# Altium PCB Boost Converter.PcbDoc
Units mm, origin at the board's own origin, x right, y up, seen from the top; angles counter-clockwise.
Board outline 20.27 x 16.42 mm, 2 copper layers (Top Layer, Bottom Layer); 9 components, 5 nets, 22 pads, 12 vias.
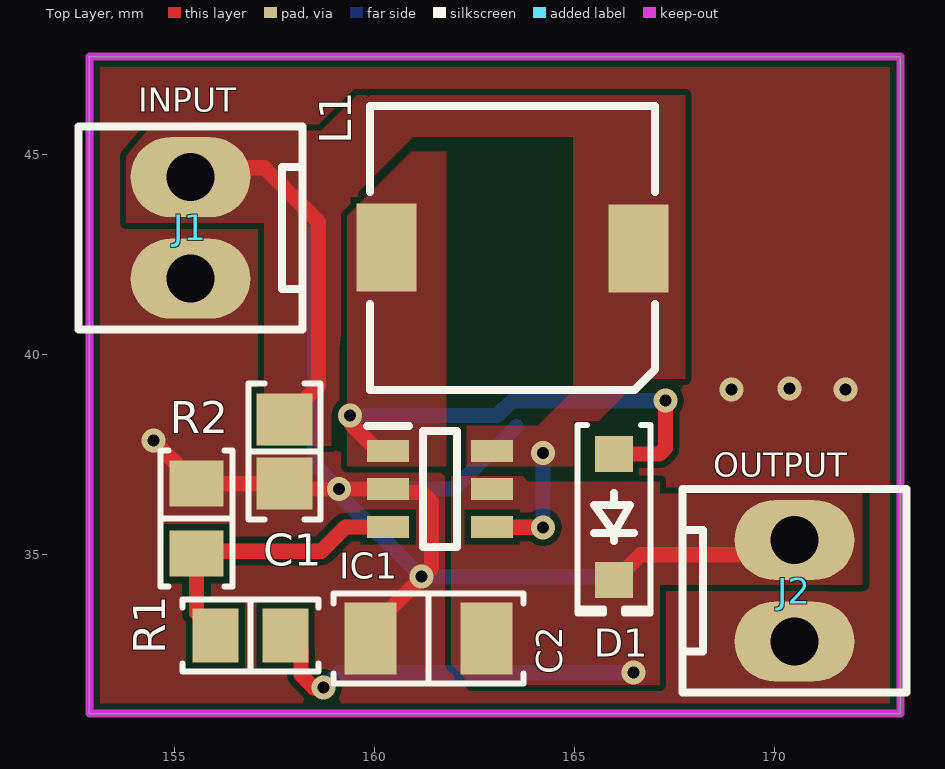
[diagram p0: Top Layer view]
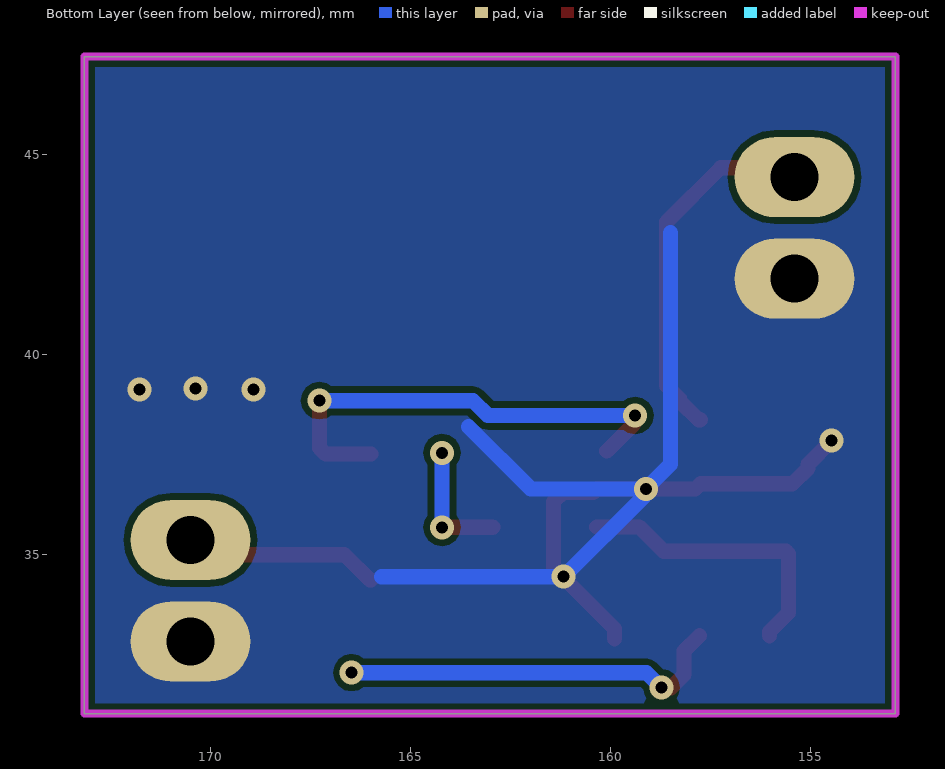
[diagram p1: Bottom Layer view, seen from below]
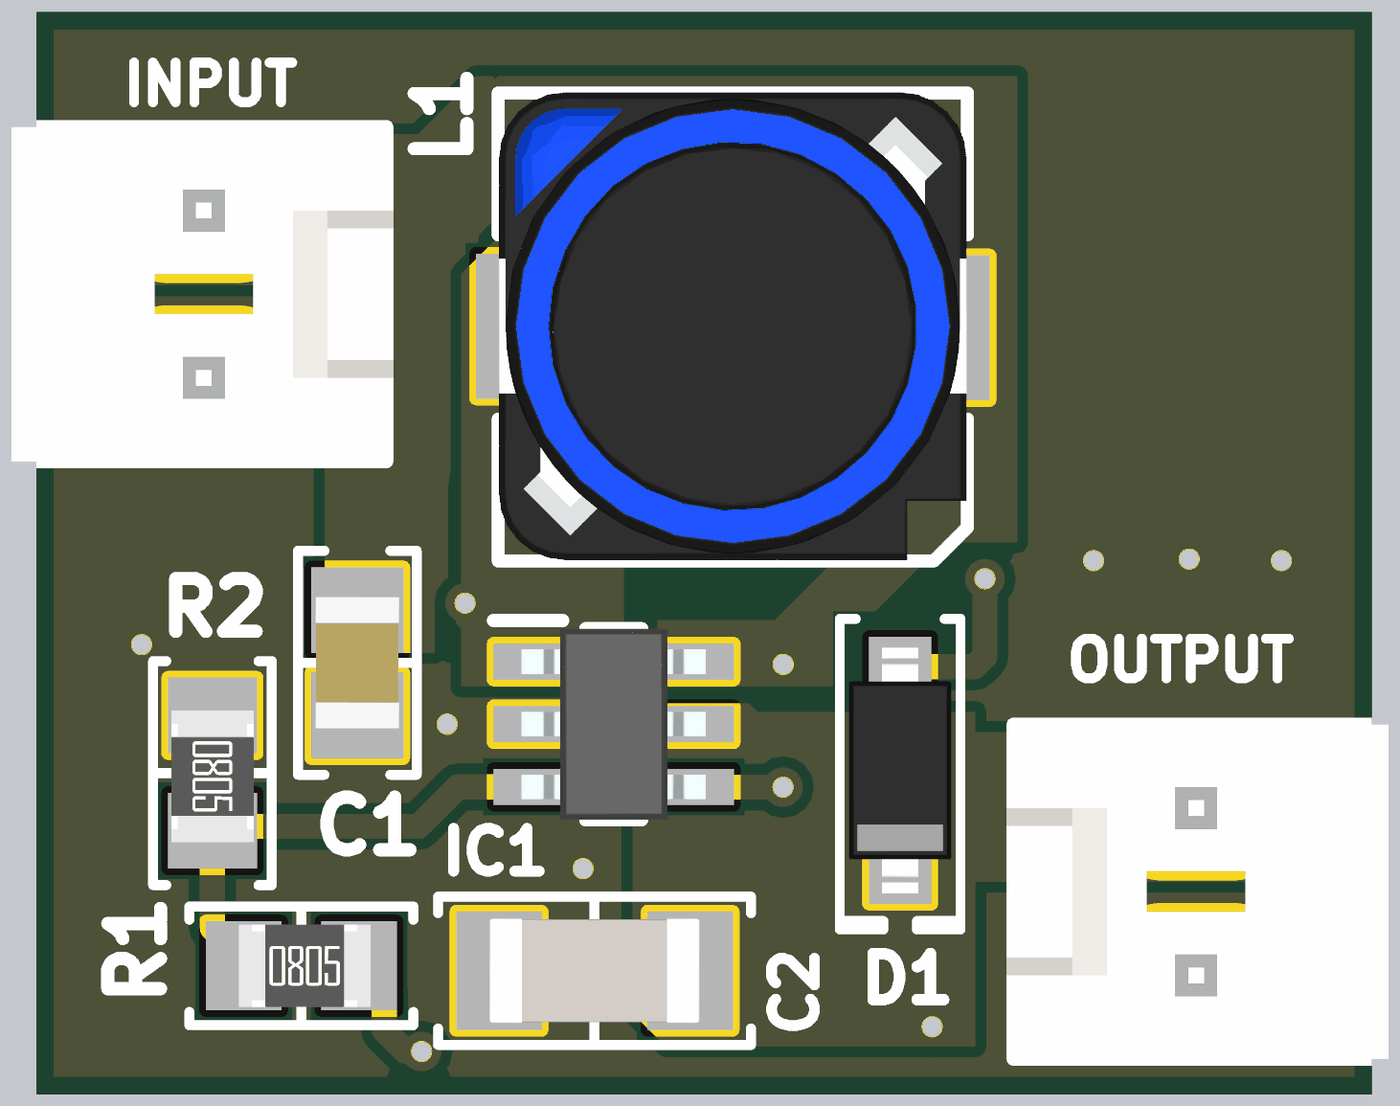
[diagram p2: 3D render of the assembled board from above, using the file's embedded part models]

## Layer stack, top to bottom
Top Solder: solder mask 0.0102, Solder Resist, Dk 3.5
Top Layer: signal copper 0.0356
Dielectric 1: dielectric 0.32, FR-4, Dk 4.8
Bottom Layer: signal copper 0.0356
Bottom Solder: solder mask 0.0102, Solder Resist, Dk 3.5

## Board outline
152.875,31.025 152.875,47.45 173.15,47.45 173.15,31.025

## Design rules (kind name [scope] priority, off if disabled: settings)
Clearance [All] p1: gap=0.16 ignorepadtopadclearanceinfootprint=FALSE
HoleToHoleClearance [All] p1: gap=0.16 allowstackedmicrovias=TRUE
MinimumSolderMaskSliver [All] p1: minsoldermaskwidth=0.16
PolygonConnect [All] p1: connectstyle=Direct reliefconductorwidth=0.254 reliefentries=4 polygonreliefangle="90 Angle" airgapwidth=0.254
RoutingVias [All] p1: holewidth=0.3 width=0.6 viastyle="Through Hole" minholewidth=0.3 minwidth=0.6 maxholewidth=0.3 maxwidth=0.6
SilkToSilkClearance [All] p1: silktosilkclearance=0.16
SolderMaskExpansion "Via Tenting" [IsVia] p1: expansion=0.102 istentingtop=TRUE
SolderMaskExpansion [All] p2: expansion=0.102 istentingtop=FALSE
Width [All] p1: maxlimit=0.8 minlimit=0.16 preferedwidth=0.2
27 further rules are at their usual default settings.

## Components (designator, comment, footprint, x,y, rotation, side; value= is the part's Value field where it differs from the comment)
C1 "10µF" "CAP 0805_2012" 157.75,37.575 r90 top
C2 "22µF" "CAP 1206_3216 - 1.8MM" 161.35,32.9 r0 top
D1 "=PartNumber" SOD-123 165.989,35.941 r270 top
IC1 "LTC3429" SOT95P280X100-6N 161.641,36.642 r0 top
J1 "=PartNumber" "MOLEX KK 0022272021" 155.4,43.17 r90 top
J2 "=PartNumber" "MOLEX KK 0022272021" 170.5,34.1 r270 top
L1 "22µH" "TDK SLF7032" 163.449,42.672 r180 top
R1 "768 Ohms" "RES 0805_2012" 156.9,32.975 r0 top
R2 "255 kOhms" "RES 0805_2012" 155.55,35.9 r270 top

## Footprints (in the part's own frame and the unit in brackets; to place one, negate y for a bottom-side part, rotate by r counter-clockwise, add the part's x,y. Pads: shape width x height; smd on the part's side, far side on the other; paste and mask are expansions set on the pad)
"CAP 0805_2012" [mm] "Chip Capacitor, 2-Leads, Body 2.00x1.20mm, IPC Medium Density"
  rect 1.3x1.4 smd: 1(-0.8,0) 2(0.8,0)
  silkscreen extent -1.7,-0.9 1.7,0.9, body extent -1,-0.64 1,0.64, height 1.26
"CAP 1206_3216 - 1.8MM" [mm] "Chip Capacitor, 2-Leads, Body 3.25x1.60mm, IPC Medium Density"
  rect 1.3x1.8 smd: 1(-1.45,0) 2(1.45,0)
  silkscreen extent -2.37,-1.12 2.37,1.12, body extent -1.6,-0.8 1.6,0.8, height 1.8
"MOLEX KK 0022272021" [mm]
  oval 2x3 hole 1.2: 1(-1.27,0) 2(1.27,0)
  silkscreen extent -2.54,-2.79 2.54,2.79, body extent -2.54,-2.9 2.54,2.9, height 11.7
"RES 0805_2012" [mm] "Chip Resistor, 2-Leads, Body 2.00x1.25mm, IPC Medium Density"
  rect 1.15x1.35 smd: 1(-0.875,0) 2(0.875,0)
  silkscreen extent -1.7,-0.9 1.7,0.9, body extent -0.95,-0.62 1.05,0.63, height 0.6
SOD-123 [mm] "SOD, 2-Leads, Body 1.55x3.70mm, IPC Medium Density"
  rect 0.9x0.95 smd: 1(-1.575,0) 2(1.575,0)
  silkscreen extent -2.3,-0.92 2.41,0.92, body extent -1.86,-0.78 1.86,0.77, height 1.35
SOT95P280X100-6N [mm]
  rect 1.05x0.55 smd: 1(-1.3,0.95) 2(-1.3,0) 3(-1.3,-0.95) 4(1.3,-0.95) 5(1.3,0) 6(1.3,0.95)
  silkscreen extent -1.83,-1.45 0.43,1.58, body extent -1.4,-1.45 1.4,1.45, height 1
"TDK SLF7032" [mm] "Power Inductor, 2-Leads, TDK, SLF7032T-221MR29-2PF"
  rect 1.5x2.2 smd: 1(-3.15,0.013) 2(3.15,-0.012)
  silkscreen extent -3.56,-3.55 3.56,3.55, body extent -3.56,-3.56 3.56,3.54, height 3.39

## Part data
C1: library part C2012X6S1C106K125AC, "CAP CER 10UF 16V X6S 0805", Device Package="0805 (2012 Metric)", Manufacturer="TDK Corporation", Operating Temperature="-55°C ~ 105°C", Supplier Part Number 1=445-7611-1-ND, Temperature Coefficient=X6S, Tolerance=±10%, Voltage - Rated=16V, Applications="General Purpose", Capacitance=10µF, ComponentLink1Description=Datasheet, ComponentLink1URL=https://product.tdk.com/info/en/catalog/datasheets/mlcc_commercial_general_en.pdf?ref_disty=digikey, ComponentLink2Description="DigiKey Link", ComponentLink2URL=http://digikey.com/product-detail/en/tdk-corporation/C2012X6S1C106K125AC/445-7611-1-ND/2733683, Features="Low ESL", LastUpdated="1/21/2020 12:03:05 AM", Lifecycle Status=Active, Minimum Order=1, Mounting Type="Surface Mount, MLCC", Package / Case="0805 (2012 Metric)", Packaging=TapeAndReel, Part Number=C2012X6S1C106K125AC, Part Status=Active, PartId=2995, Price=0.09, Series=C, Size / Dimension="0.079\" L x 0.049\" W (2.00mm x 1.25mm)", Supplier 1=DigiKey, Thickness (Max)="0.057\" (1.45mm)"
C2: library part CL31X226KOHN3NE, "CAP CER 22UF 16V X6S 1206", Device Package="1206 (3216 Metric)", Manufacturer="Samsung Electro-Mechanics", Operating Temperature="-55°C ~ 105°C", Supplier Part Number 1=1276-3300-1-ND, Temperature Coefficient=X6S, Tolerance=±10%, Voltage - Rated=16V, Applications="General Purpose", Capacitance=22µF, ComponentLink1Description=Datasheet, ComponentLink1URL=http://www.samsungsem.com/kr/support/product-search/mlcc/CL31X226KOHN3NE.jsp, ComponentLink2Description="DigiKey Link", ComponentLink2URL=http://digikey.com/product-detail/en/samsung-electro-mechanics/CL31X226KOHN3NE/1276-3300-1-ND/3891386, LastUpdated="1/21/2020 12:03:49 AM", Lifecycle Status=Active, Minimum Order=1, Mounting Type="Surface Mount, MLCC", Package / Case="1206 (3216 Metric)", Packaging=TapeAndReel, Part Number=CL31X226KOHN3NE, Part Status=Active, PartId=19636, Price=0.13, Series=CL, Size / Dimension="0.126\" L x 0.063\" W (3.20mm x 1.60mm)", Supplier 1=DigiKey, Thickness (Max)="0.071\" (1.80mm)"
D1: library part MBR0520L, "DIODE SCHOTTKY 20V 500MA SOD123", Current - Average Rectified (Io)=500mA, Current - Reverse Leakage @ Vr="250µA @ 20V", Device Package=SOD-123, Manufacturer="ON Semiconductor", Operating Temperature - Junction="-65°C ~ 125°C", Supplier Part Number 1=MBR0520LCT-ND, Voltage - DC Reverse (Vr) (Max)=20V, Voltage - Forward (Vf) (Max) @ If="385mV @ 500mA", ComponentLink1Description=Datasheet, ComponentLink1URL=https://www.onsemi.cn/PowerSolutions/document/MBR0520L-D.pdf, ComponentLink2Description="DigiKey Link", ComponentLink2URL=http://digikey.com/product-detail/en/on-semiconductor/MBR0520L/MBR0520LCT-ND/458961, Diode Type=Schottky, LastUpdated="1/21/2020 2:42:45 AM", Lifecycle Status=Active, Minimum Order=1, Mounting Type="Surface Mount", Package / Case=SOD-123, Packaging=TapeAndReel, Part Number=MBR0520L, Part Status=Active, PartId=2226, Price=0.06, Series=-, Speed="Fast Recovery =< 500ns, > 200mA (Io)", Supplier 1=DigiKey, Supplier Device Package=SOD-123
IC1: library part LTC3429ES6, "Boost Switching Regulator IC Positive Adjustable 2.5V 1 Output 600mA (Switch) SOT-23-6 Thin, TSOT-23-6"
J1 J2: library part 0022272021, "CONN HEADER VERT 2POS 2.54MM", Insulation Color=Natural, Manufacturer=Molex, Material Flammability Rating="UL94 V-0", Supplier Part Number 1=WM4111-ND, ComponentLink1Description=Datasheet, ComponentLink1URL=https://www.molex.com/pdm_docs/sd/022272021_sd.pdf, ComponentLink2Description="DigiKey Link", ComponentLink2URL=http://digikey.com/product-detail/en/molex/0022272021/WM4111-ND/1130577, Connector Type=Header, Contact Finish - Mating=Tin, Contact Finish - Post=Tin, Contact Finish Thickness - Mating="100.0µin (2.54µm)", Contact Length - Mating="0.295\" (7.49mm)", Contact Length - Post="0.140\" (3.56mm)", Contact Material=Brass, Contact Shape=Square, Contact Type="Male Pin", Fastening Type="Friction Lock", Insulation Height="0.461\" (11.70mm)", Insulation Material="Polyamide (PA), Nylon", LastUpdated="1/12/2020 11:51:43 PM", Lifecycle Status=Active, Minimum Order=1, Mounting Type="Through Hole", Number of Positions=2, Number of Positions Loaded=All, Number of Rows=1, Overall Contact Length="0.560\" (14.22mm)", Packaging=Bulk, Part Number=0022272021, Part Status=Active, PartId=76, Pitch - Mating="0.100\" (2.54mm)", Price=0.27, Series="KK 6410", Shrouding="Shrouded - 1 Wall", Style="Board to Cable/Wire", Supplier 1=DigiKey, Termination=Solder
L1: library part SLF7032T-220MR96-2PF, "FIXED IND 22UH 960MA 132 MOHM", Current Rating (Amps)=960mA, DC Resistance (DCR)="132mOhm Max", Device Package=Nonstandard, Inductance Frequency - Test=100kHz, Manufacturer="TDK Corporation", Operating Temperature="-40°C ~ 105°C", Supplier Part Number 1=445-2003-1-ND, Tolerance=±20%, ComponentLink1Description=Datasheet, ComponentLink1URL=//media.digikey.com/pdf/Data%20Sheets/TDK%20PDFs/SLF7032_Type.pdf, ComponentLink2Description="DigiKey Link", ComponentLink2URL=http://digikey.com/product-detail/en/tdk-corporation/SLF7032T-220MR96-2PF/445-2003-1-ND/755410, Height - Seated (Max)="0.134\" (3.40mm)", Inductance=22µH, LastUpdated="3/30/2020 8:54:50 PM", Lifecycle Status=Active, Material - Core=Ferrite, Minimum Order=1, Mounting Type="Surface Mount", Package / Case=Nonstandard, Packaging=TapeAndReel, Part Number=SLF7032T-220MR96-2PF, Part Status=Active, PartId=3680, Price=0.43, Series=SLF, Shielding=Shielded, Size / Dimension="0.276\" L x 0.276\" W (7.00mm x 7.00mm)", Supplier 1=DigiKey, Type=Wirewound
R1: library part RMCF0805FT768R, "RES 768 OHM 1% 1/8W 0805", Device Package="0805 (2012 Metric)", Manufacturer="Stackpole Electronics Inc", Operating Temperature="-55°C ~ 155°C", Power (Watts)="0.125W, 1/8W", Ratings=AEC-Q200, Supplier Device Package=0805, Supplier Part Number 1=RMCF0805FT768RCT-ND, Temperature Coefficient=±100ppm/°C, Tolerance=±1%, ComponentLink1Description=Datasheet, ComponentLink1URL=https://www.seielect.com/catalog/sei-rmcf_rmcp.pdf, ComponentLink2Description="DigiKey Link", ComponentLink2URL=http://digikey.com/product-detail/en/stackpole-electronics-inc/RMCF0805FT768R/RMCF0805FT768RCT-ND/1942367, Composition="Thick Film", Features="Automotive AEC-Q200", Height - Seated (Max)="0.026\" (0.65mm)", LastUpdated="1/21/2020 1:41:18 AM", Lifecycle Status=Active, Minimum Order=1, Number of Terminations=2, Package / Case="0805 (2012 Metric)", Packaging=CutTape, Part Number=RMCF0805FT768R, Part Status=Active, PartId=46882, Price=0.10, Resistance="768 Ohms", Series=RMCF, Size / Dimension="0.079\" L x 0.049\" W (2.00mm x 1.25mm)", Supplier 1=DigiKey
R2: library part 3-2176094-2, "RES SMD 255K OHM 0.1% 1/4W 0805", Device Package="0805 (2012 Metric)", Manufacturer="TE Connectivity Passive Product", Operating Temperature="-55°C ~ 155°C", Power (Watts)="0.25W, 1/4W", Supplier Device Package=0805, Supplier Part Number 1=A110774CT-ND, Temperature Coefficient=±25ppm/°C, Tolerance=±0.1%, ComponentLink1Description=Datasheet, ComponentLink1URL=https://www.te.com/commerce/DocumentDelivery/DDEController?Action=srchrtrv&DocNm=1773272&DocType=DS&DocLang=English, ComponentLink2Description="DigiKey Link", ComponentLink2URL=http://digikey.com/product-detail/en/te-connectivity-passive-product/3-2176094-2/A110774CT-ND/4035129, Composition="Thin Film", Height - Seated (Max)="0.026\" (0.65mm)", LastUpdated="1/21/2020 1:38:54 AM", Lifecycle Status=Active, Minimum Order=1, Number of Terminations=2, Package / Case="0805 (2012 Metric)", Packaging=TapeAndReel, Part Number=3-2176094-2, Part Status=Active, PartId=49793, Price=0.15, Resistance="255 kOhms", Series="RP73P, Holsworthy", Size / Dimension="0.079\" L x 0.049\" W (2.00mm x 1.25mm)", Supplier 1=DigiKey

## Via types
v1: diameter 0.6, hole 0.3, Top Layer to Bottom Layer, tented both sides, 12 vias

## Nets (pads, with @x,y where several pads share a name; then routed paths per layer and width w, separated by ;. In a path a pad name is that pad's centre, name@x,y a point inside that pad or via, vN(x,y) a via of type N, cw(c..) or ccw(c..) an arc to the next point about the centre after c; other vN are vias at no path point)
FB: IC1.3 R1.1 R2.2 | length 7.3
  Top Layer w0.381: R1.1 156.025,33.075 155.55,33.55 R2.2 155.615,35.09 158.675,35.09 159.277,35.692 IC1.3
GND: C1.1 C2.1 IC1.2 J1.1 J2.2 R2.1 | length 31
  Top Layer w0.381: v1(154.475,37.85) 155.065,37.259 155.065,37.159 155.45,36.775 R2.1 C1.1 157.883,36.642 v1(159.112,36.642) IC1.2 160.426,36.557 161.193,36.557 161.425,36.325 161.425,34.675 159.9,33.15 C2.1
  Bottom Layer w0.381: 158.5,43.049 158.5,37.262 v1@159.112,36.65 ; 163.55,38.2 161.992,36.642 v1(159.112,36.642) 159.154,36.6 159.154,36.471 v1(161.175,34.45) 165.725,34.45
  other v1: 168.925,39.125 171.775,39.125 170.375,39.15
INPUT: C1.2 IC1.4 IC1.6 J1.2 L1.1 | length 11.8
  Top Layer w0.381: J1.2@155.85,44.675 157.244,44.675 158.6,43.319 158.6,39.225 158.26,38.884 158.26,38.834 157.8,38.375 C1.2 ; IC1.4 162.943,35.689 v1@164.209,35.689
  Bottom Layer w0.381: v1(164.211,35.687) v1(164.211,35.687) 164.212,37.548 v1(164.213,37.55)
NetD1_1: D1.1 IC1.1 L1.2 | length 11.8
  Top Layer w0.381: v1(159.385,38.481) 159.427,38.439 159.427,38.256 IC1.1@160.091,37.592 ; D1.1 167.124,37.516 167.275,37.667 v1(167.275,38.85)
  Bottom Layer w0.381: v1(159.385,38.481) 163.066,38.481 163.435,38.85 v1(167.275,38.85)
OUTPUT: C2.2 D1.2 IC1.5 J2.1 R1.2 | length 13.8
  Top Layer w0.381: R1.2 158.16,32.59 158.16,32 158.484,31.675 v1(158.725,31.675) ; D1.2 166.014,34.366 166.648,35 J2.1@169.775,35
  Bottom Layer w0.381: v1(158.725,31.675) 159.1,32.05 v1(166.475,32.05)

## Polygon pours and split planes (outlines as drawn)
GND on Top Layer "GND_L01_P014" (solid, remove dead copper, pour order 14): 152.875,47.45 152.875,31.025 173.15,31.025 173.15,47.45
OUTPUT on Top Layer "OUTPUT_L01_P013" (solid, pour order 13): 172.2,34.25 172.2,36.525 166.625,36.525 166.625,34.25
INPUT on Top Layer "INPUT_L01_P012" (solid, pour order 12): 158.916,38.481 158.925,38.472 158.925,37.725 157.25,37.725 157.25,43.3 153.8,43.3 153.8,44.375 153.8,44.975 154.325,45.6 158.675,45.6 159.557,46.482 159.893,46.482
INPUT on Top Layer "INPUT_L01_P000" (solid, pour order 0): 162.306,37.211 164.973,37.211 164.973,38.354 165.608,38.354 166.654,39.4 167.767,39.4 167.767,46.482 164.973,46.482 164.973,39.116 164.084,38.227 162.306,38.227
INPUT on Top Layer "INPUT_L01_P001" (solid, pour order 1): 158.225,38.481 159.125,38.481 159.125,43.6 160.975,45.45 167.767,45.45 167.767,46.482 159.893,46.482 158.225,44.814 158.225,42.575
GND on Top Layer "GND_L01_P010" (solid, remove dead copper, pour order 10): 153.416,47.45 153.416,31.025 171.35,31.025 171.35,47.45
no net on Top Layer "Top Layer-No Net" (solid, pour order 5): 168.85,37.775
OUTPUT on Top Layer "OUTPUT_L01_P003" (solid, pour order 3): 161.925,36.957 161.925,32.258 162.433,31.75 164.211,31.75 167.132,31.75 167.132,36.83 163.83,36.83 163.703,36.957
NetD1_1 on Top Layer "NETD1_1_L01_P002" (solid, pour order 2): 159.325,43.475 160.925,45.075 161.798,45.075 161.798,37.211 159.325,37.211
GND on Bottom Layer "GND_L02_P015" (solid, remove dead copper, pour order 15): 152.875,47.45 152.875,31.025 173.15,31.025 173.15,47.45

## Keep-outs
Keep-Out Layer:
  the board outline again, w0.2

## Silkscreen, mask and mechanical layers (free items; w line width, h text height)
Top Overlay:
  text "INPUT" at 154.1,46.075 h0.6
  text "OUTPUT" at 168.475,36.95 h0.6